# EAGLE board rw-directish-17mm-mk-1.1 (EAGLE 7.5.0)
VERSION: v1.1
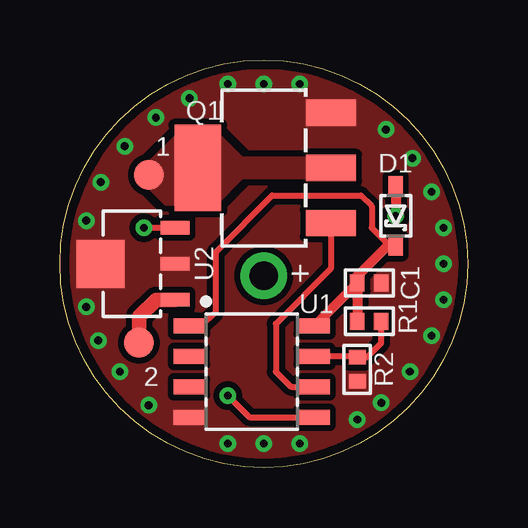
[diagram p0: board, top side]
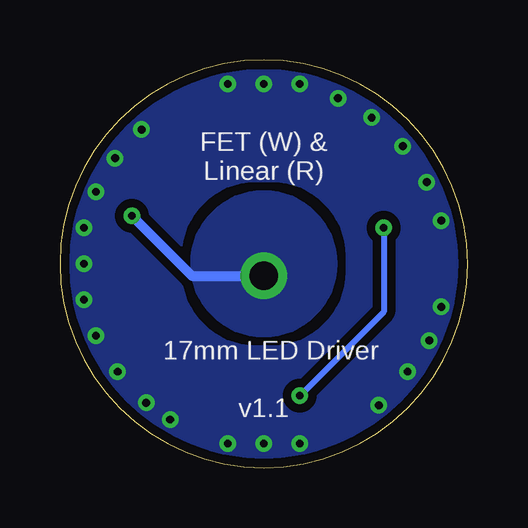
[diagram p1: board, bottom side, seen from below]

Size 17 x 17 mm. Coordinates in mm from the lower left corner, seen from the top.
Outline: 0,8.5 arc-180 17,8.5 arc-180 0,8.5
Copper layers (1*16): Top 0.0356mm / dielectric 1.5011mm / Bottom 0.0356mm
Design rules "LaenPCBOrder2": minimum track width 6mil, minimum drill 13mil, track to track 6mil, track to pad 6mil, pad to pad 6mil, via to via 6mil, smd to smd 6mil, copper to edge 15mil, drill to drill 6mil, minimum pad ring 7mil, minimum via ring 7mil, stop-mask expansion 3mil, vias tented up to drill 20mil, thermal gap 10mil

## Footprints (pad centres in the part's own frame; a part is rotated, then mirrored left to right if it is on the bottom)
1X01-SMD-1.25MM-DIA-NS = smd 1.25 x 1.25: P$1 0,0
1X01-1.2MM-NS = drill 1.2 pad 1.93: P$1 0,0
1X01_NOSILK_NOSTOP = drill 0.33: P$1 0,0
C0402 = smd 0.6 x 0.7: 1 -0.5,0; 2 0.5,0
SOD323-SCHOTTKY = smd 0.8 x 0.6: A -1.25,0; C 1.25,0
SOT223-CLOSER = smd 1.1 x 2.1: 1 -2.3,-2.8; 2 0,-2.8; 3 2.3,-2.8 | smd 3.6 x 1.95: 4 0,2.75
R0402 = smd 0.6 x 0.7: 1 -0.5,0; 2 0.5,0
SO08-NARROWER = smd 0.635 x 1.27: 1 -1.905,-2.616; 2 -0.635,-2.616; 3 0.635,-2.616; 4 1.905,-2.616; 5 1.905,2.616; 6 0.635,2.616; 7 -0.635,2.616; 8 -1.905,2.616
SOT89-NOTHERM = smd 0.58 x 1.2: 1 -1.5,-1.8; 3 1.5,-1.8; 4@1 0,-1.8 | smd 2 x 2: 4@2 0,1.3

## Placement (x,y rotation side)
1  M01SMD-1.25MM-DIA  [1X01-SMD-1.25MM-DIA-NS]  3.7,12.2 270 top
2  M01SMD-1.25MM-DIA  [1X01-SMD-1.25MM-DIA-NS]  3.3,5.2 0 top
+  M01PTH-1.2MM-NS  [1X01-1.2MM-NS]  8.5,8 90 top
-  M01NOT-A-VIA-NOPE  [1X01_NOSILK_NOSTOP]  2.5,4 90 bottom
C1  1u  [C0402]  12.9,7.7 0 top
D1  BAT165  [SOD323-SCHOTTKY]  14,10.5 270 top
FRAME1  FRAME-LETTERNO_PACKAGE  [DUMMY]  0,0 0 top
Q1  MOSFET-NCHANNELSOT-223-CLOSER  [SOT223-CLOSER]  8.5,12.5 90 top
R1  19K  [R0402]  12.9,6.1 180 top
R2  4K7  [R0402]  12.4,4.1 90 top
U1  ATTiny13  [SO08-NARROWER]  8,4 270 top
U2  AMC7135SOT-89-NOTHERM  [SOT89-NOTHERM]  3,8.5 90 top

## Library data of the parts
1 2 + - C1 D1 Q1 R1 R2 U1 U2 = a_parts
FRAME1 = a_parts; DESIGNER: sean@yak.net; VERSION: v1.1

## Nets
GND: -.P$1 C1.2 Q1.3 R2.1 U1.4 U2.4@1 U2.4@2
N$1: R1.1 R2.2 U1.7
PWM_R: U1.5 U2.3
PWM_W: Q1.1 U1.6
R: 2.P$1 U2.1
VBAT: +.P$1 D1.A
VCC: C1.1 D1.C R1.2 U1.1 U1.8
W: 1.P$1 Q1.2 Q1.4

## Tracks (layer width: path | path; a pad name or v marks a point on that pad's centre or on a via)
GND  (via drill 0.33)
  other vias: 1.1,6.7 8.5,16 1.1,10.3 15.5,11.5 15.5,5.5 1.6,5.3 8.5,1 16,8.5 13.6,14.1 1.7,11.9 4,14.6 2.7,13.4 7,16 10,16 10,1 7,1 3.7,2.6 12.4,2 13.4,2.7 14.6,4 16,7 16,10 14.7,12.9 5.4,15.4
  pour Top (isolate 0.25, rank 6, no thermals): 0,0 17,0 17,17 0,17
  pour Bottom (isolate 0.35, rank 6, no thermals): 0,0 0,17 17,17 17,0
N$1
  Top 0.25: U1.7 12.37,4.63 R2.2 12.8,4.6 13.4,5.2 R1.1
PWM_R  (via drill 0.33)
  Top 0.25: U2.3 v3.5,10 | v7,3 7.91,2.1 U1.5
  Bottom 0.25: v3.5,10 3.5,6.5 v7,3
PWM_W
  Top 0.25: Q1.1 11.3,8.3 9,6 9,4 9.63,3.37 U1.6
R
  Top 0.6: U2.1 4,7 3.3,6.3 2.P$1
VBAT  (via drill 0.33)
  Top 0.406: D1.A v14,10.5
  Bottom 0.406: v14,10.5 11.5,8 +.P$1
  pour Bottom (isolate 0.152, no thermals): 5.5,8.5 arc-180 11.5,8.5 arc-180
VCC
  Top 0.25: U1.1 5.91,5.91 6.5,6.5 6.5,9 8.85,11.35 12.55,11.35 13,10.9 13,10 13.75,9.25 D1.C
  Top 0.406: 13.75,9.25 13.65,9.25 12.4,8 C1.1 | C1.1 R1.2 | U1.8 C1.1
W
  pour Top (isolate 0.152, rank 5, no thermals): 3.7,11.7 4.4,11 6.5,11 7.6,12.1 12.1,12.1 12.1,12.9 7.6,12.9 6.5,14 5,14 3.7,12.7

## Text on the board
bPlace: FET (W) & / Linear (R) | 17mm LED Driver